# EAGLE board RCP2N64Adv2 (EAGLE 9.6.2)
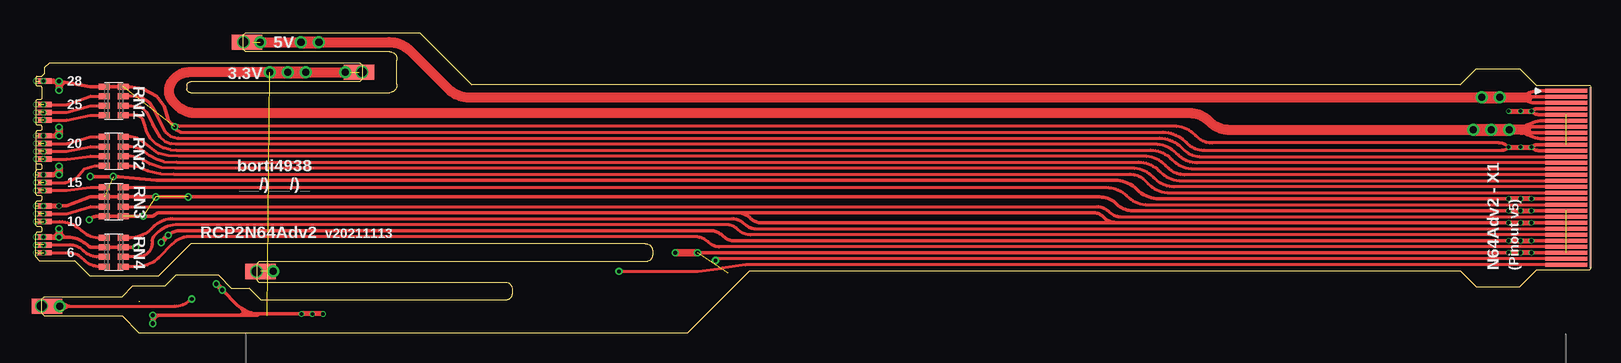
[diagram p0: board, top side]
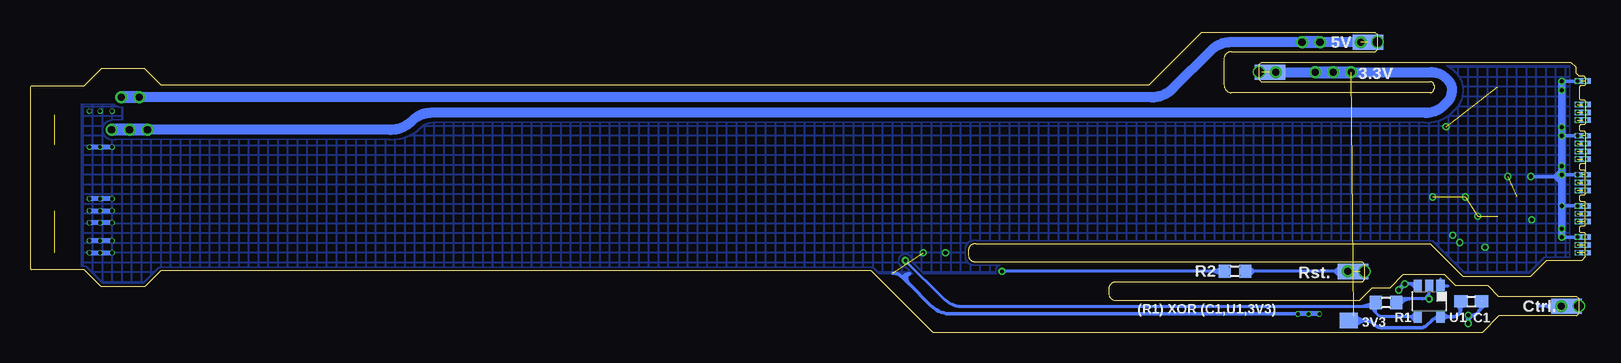
[diagram p1: board, bottom side, seen from below]

Size 129.6 x 25 mm. Coordinates in mm from the lower left corner, seen from the top.
Outline: 0,13.45 0.1,13.55 0.4,13.55 0.5,13.65 0.5,13.95 0.4,14.05 0.1,14.05 0,14.15 0,16.7 0.1,16.8 0.4,16.8 0.5,16.9 0.5,17.2 0.4,17.3 0.1,17.3 0,17.4 0,19.3 0.1,19.4 0.4,19.4 0.5,19.5 0.5,20.45 0.4,20.55 0.1,20.55 0,20.65 0,21.25 0.1,21.35 0.5,21.35 0.75,21.6 0.75,22.1 1.15,22.5 27,22.5 27.2,22.3 27.2,21.1 27,20.9 12.9,20.9 arc90 12.6,20.6 12.6,20.3 arc90 12.9,20 29.5,20 arc90 30.1,20.7 30.1,22.7 arc99 29.5,23.4 17.5,23.4 17.3,23.6 17.3,24.8 17.5,25 32,25 36.35,20.65 118.7,20.65 120.05,22 123.65,22 125.1,20.55 129.55,20.55 129.6,20.5 129.6,5.35 129.5,5.25 125.1,5.25 123.65,3.8 120.05,3.8 118.7,5.15 59.5,5.15 54.35,0 8.6,0 7.2,1.4 0.7,1.4 0.5,1.6 0.5,2.8 0.7,3 7.2,3 8.1,3.9 10.8,3.9 11.7,4.8 15.2,4.8 16.3,3.7 17.8,3.7 18.8,2.7 39.1,2.7 arc99 39.7,3.3 39.7,3.6 arc99 39.1,4.2 18.6,4.2 18.4,4.4 18.4,5.7 18.6,5.9 50.8,5.9 arc99 51.4,6.5 51.4,6.8 arc99 50.8,7.4 12.9,7.4 10.2,4.7 4.55,4.7 3.25,6 0.3,6 0,6.3 0,8.25 0.1,8.35 0.4,8.35 0.5,8.45 0.5,8.75 0.4,8.85 0.1,8.85 0,8.95 0,10.85 0.1,10.95 0.4,10.95 0.5,11.05 0.5,11.35 0.4,11.45 0.1,11.45 0,11.55 0,13.45
Outline: 0,14.1 0,13.45
Copper layers (1*16): Top 0.018mm / dielectric 1.55mm / Bottom 0.018mm
Design rules "Multi-CB_2L_100um-Tracks_OL35um *": minimum track width 0.1mm, minimum drill 0.3mm, track to track 6mil, track to pad 6mil, pad to pad 6mil, via to via 6mil, smd to smd 0mil, copper to edge 0.2mm, drill to drill 0.2mm, minimum pad ring 0.125mm, minimum via ring 0.02mm, stop-mask expansion 2mil, vias tented up to drill 0.45mm, thermal gap 0.2mm
bRestrict: area -0.4,5.9 to 1.2,22.5; area 125.4,5.2 to 129.6,20.7; area -0.6,0.3 to 60.2,4.8; area 119.3,17.6 to 121.8,19; area 117.5,19.1 to 125.5,22.7; 14 lines

## Footprints (pad centres in the part's own frame; a part is rotated, then mirrored left to right if it is on the bottom)
SMD1,27-2,54 = smd 1.27 x 2.54: 1 0,0
C0603 = smd 1.1 x 1: 1 -0.85,0; 2 0.85,0
CTS742C083 = smd 0.5 x 0.9: 1 -1.2,-0.8; 2 -0.4,-0.8; 3 0.4,-0.8; 4 1.2,-0.8; 5 1.2,0.8; 6 0.4,0.8; 7 -0.4,0.8; 8 -1.2,0.8
EDGE-FH12-30S-0.5SH = smd 0.3 x 3.5: 1 -7.25,3.25; 2 -6.75,3.25; 3 -6.25,3.25; 4 -5.75,3.25; 5 -5.25,3.25; 6 -4.75,3.25; 7 -4.25,3.25; 8 -3.75,3.25; 9 -3.25,3.25; 10 -2.75,3.25; 11 -2.25,3.25; 12 -1.75,3.25; 13 -1.25,3.25; 14 -0.75,3.25; 15 -0.25,3.25; 16 0.25,3.25; 17 0.75,3.25; 18 1.25,3.25; 19 1.75,3.25; 20 2.25,3.25; 21 2.75,3.25; 22 3.25,3.25; 23 3.75,3.25; 24 4.25,3.25; 25 4.75,3.25; 26 5.25,3.25; 27 5.75,3.25; 28 6.25,3.25; 29 6.75,3.25; 30 7.25,3.25
SMD0,45-1,35 = smd 1.35 x 0.45: P$1 0,0
SMD0.8SQ = smd 1.27 x 1.524: P$1 0,0
R0603 = smd 1 x 1.1: 1 -0.85,0; 2 0.85,0
DBV_R-PDSO-G5 = smd 0.69 x 0.99: 1 -0.95,-1.29; 2 0,-1.29; 3 0.95,-1.29; 4 0.95,1.3; 5 -0.95,1.3

## Placement (x,y rotation side)
+3.3V  [SMD1,27-2,54]  26.95,21.7 90 top
+3.3V1  [SMD1,27-2,54]  26.25,21.7 90 bottom
+5V  [SMD1,27-2,54]  17.6,24.2 90 top
+5V1  [SMD1,27-2,54]  18.1,24.2 90 bottom
C1  [C0603]  9.5,2.6 0 bottom
E$1  [CTS742C083]  6.5,6.7 90 top
E$2  [SMD1,27-2,54]  19.35,5.1 90 bottom
E$3  [CTS742C083]  6.5,19.3 270 top
E$4  [CTS742C083]  6.5,15.1 270 top
E$5  [CTS742C083]  6.5,10.9 270 top
E$6  [SMD1,27-2,54]  1.55,2.2 90 bottom
E$7  [EDGE-FH12-30S-0.5SH]  124.3,12.9 270 top
E$8  [SMD0,45-1,35]  0.65,9.9 0 top
E$9  [SMD0,45-1,35]  0.65,10.55 0 top
E$10  [SMD0,45-1,35]  0.65,11.85 0 top
E$11  [SMD0,45-1,35]  0.65,12.5 0 top
E$12  [SMD0,45-1,35]  0.65,13.15 0 top
E$13  [SMD0,45-1,35]  0.65,14.45 0 top
E$14  [SMD0,45-1,35]  0.65,15.1 0 top
E$15  [SMD0,45-1,35]  0.65,15.75 0 top
E$16  [SMD0,45-1,35]  0.65,16.4 0 top
E$17  [SMD0,45-1,35]  0.65,17.7 0 top
E$18  [SMD0,45-1,35]  0.65,18.35 0 top
E$19  [SMD0,45-1,35]  0.65,19 0 top
E$20  [SMD0.8SQ]  19.7,1 270 bottom
E$22  [SMD0,45-1,35]  0.2,19 0 bottom
E$23  [SMD0,45-1,35]  0.2,18.35 0 bottom
E$24  [SMD0,45-1,35]  0.2,17.7 0 bottom
E$25  [SMD0,45-1,35]  0.2,16.4 0 bottom
E$26  [SMD0,45-1,35]  0.2,15.75 0 bottom
E$27  [SMD0,45-1,35]  0.2,15.1 0 bottom
E$28  [SMD0,45-1,35]  0.2,14.45 0 bottom
E$29  [SMD0,45-1,35]  0.2,13.15 0 bottom
E$30  [SMD0,45-1,35]  0.2,12.5 0 bottom
E$31  [SMD0,45-1,35]  0.2,11.85 0 bottom
E$32  [SMD0,45-1,35]  0.2,10.55 0 bottom
E$33  [SMD0,45-1,35]  0.2,9.9 0 bottom
E$34  [SMD1,27-2,54]  18.75,5.1 90 top
E$35  [SMD1,27-2,54]  0.95,2.2 90 top
E$38  [SMD0,45-1,35]  0.65,9.25 0 top
E$40  [SMD0,45-1,35]  0.65,7.3 0 top
E$41  [SMD0,45-1,35]  0.65,6.65 0 top
E$42  [SMD0,45-1,35]  0.2,9.25 0 bottom
E$43  [SMD0,45-1,35]  0.2,7.95 0 bottom
E$44  [SMD0,45-1,35]  0.2,7.3 0 bottom
E$45  [SMD0,45-1,35]  0.2,6.65 0 bottom
E$46  [SMD0,45-1,35]  0.65,20.95 0 top
E$47  [SMD0,45-1,35]  0.2,20.95 0 bottom
GND  [SMD0,45-1,35]  0.65,7.95 0 top
R1  [R0603]  16.6,2.5 180 bottom
R2  [R0603]  29.2,5.1 180 bottom
U1  [DBV_R-PDSO-G5]  13,2.6 180 bottom

## Library data of the parts
+3.3V +3.3V1 +5V +5V1 E$2 E$6 E$8-E$20 E$22-E$35 E$38 E$40-E$47 GND = wirepad
C1 R1 R2 = rcl
E$1 E$3-E$5 = resistor-net
E$7 = con-hirose
U1 = 74xx-little-de

## Nets
3V3: +3.3V1.1 +3.3V.1 C1.1 E$7.6 E$7.7 E$7.8 E$7.9 E$20.P$1 U1.5
#DSYNC: E$5.1 E$10.P$1 E$31.P$1
#DSYNC.1: E$5.8 E$7.20
+5V: +5V1.1 +5V.1 E$7.1 E$7.2 E$7.3
CTRL: E$6.1 E$35.1 R1.1 U1.2
CTRL.1: E$7.29 R1.2 U1.4
D0: E$3.2 E$19.P$1 E$22.P$1
D0.1: E$3.7 E$7.12
D1: E$3.3 E$18.P$1 E$23.P$1
D1.1: E$3.6 E$7.13
D2: E$3.4 E$17.P$1 E$24.P$1
D2.1: E$3.5 E$7.14
D3: E$4.1 E$15.P$1 E$26.P$1
D3.1: E$4.8 E$7.15
D4: E$4.2 E$14.P$1 E$27.P$1
D4.1: E$4.7 E$7.16
D5: E$4.3 E$13.P$1 E$28.P$1
D5.1: E$4.6 E$7.17
D6: E$4.4 E$11.P$1 E$30.P$1
D6.1: E$4.5 E$7.18
GND: C1.2 E$1.3 E$1.6 E$3.1 E$3.8 E$5.2 E$5.4 E$5.5 E$5.7 E$7.4 E$7.5 E$7.10 E$7.11 E$7.19 E$7.21 E$7.23 E$7.26 E$7.28 E$9.P$1 E$12.P$1 E$16.P$1 E$25.P$1 E$29.P$1 E$32.P$1 E$46.P$1 U1.3
LRCLK: E$1.5 E$38.P$1
LRCLK.1: E$1.4 E$7.24
RST: E$2.1 E$34.1 R2.1
RST.1: E$7.30 R2.2
SCLK: E$1.8 E$41.P$1
SCLK.1: E$1.1 E$7.27
SDATA: E$1.7 E$40.P$1
SDATA.1: E$1.2 E$7.25
VCLK: E$5.3 E$8.P$1 E$33.P$1
VCLK.1: E$5.6 E$7.22

## Tracks (layer width: path | path; a pad name or v marks a point on that pad's centre or on a via)
3V3  (via drill 0.6 pad 1)  (2 unrouted)
  Top 0.254: E$7.6 126,17.65 | 124.21,16.91 124.2,16.9 | 123.81,16.89 123.8,16.9 123.81,16.91
  Top 0.305: E$7.7 124.8,17.15 arc45 124.21,16.91 | E$7.8 124.8,16.65 arc-45 124.2,16.9 | E$7.9 125.6,16.15 arc-45 123.81,16.89 | E$7.6 125.6,17.65 arc45 123.81,16.91
  Top 0.813: v22.5,21.7 v25.8,21.7 | 124.2,16.9 123.8,16.9 v122.8,16.9 | v19.5,21.7 12.81,21.7 arc45 11.6,21.2 11.52,21.12 arc45 11.1,20.1 arc45 11.45,19.25 11.7,19 arc45 13.39,18.3 96.11,18.3 arc-45 97.8,17.6 arc45 99.49,16.9 v119.8,16.9
  Top 1.016: v119.8,16.9 v121.3,16.9 v122.8,16.9 | v19.5,21.7 v21,21.7 v22.5,21.7
  Bottom 0.305: 12,1.3 U1.5 12.08,1.3 arc-45 12.8,1 13.19,0.61 arc45 13.7,0.4 16.88,0.4 arc45 17.6,0.7 arc-45 18.32,1 18.5,1 | 12,1.3 11.5,1.3 | 11.5,1.3 11.08,1.3 arc-45 10.6,1.5 arc-45 10.35,2.1 10.35,2.45 | 10.35,2.45 C1.1 | 12,1.6 11.5,1.3 | 11.5,1.3 12,1 | 10.35,2.45 10.7,2.45 10.4,1.95 10,2.45 | 12,1.3 12.2,1.5 12.5,1.2 12.2,1 | 18.5,1 E$20.P$1 | 19.3,1.4 18.5,1 | 18.5,1 19.2,0.6
  Bottom 0.813: +3.3V1.1 v22.5,21.7 | v19.5,21.7 12.81,21.7 arc45 11.6,21.2 11.45,21.05 arc45 11.1,20.2 arc45 11.52,19.18 11.73,18.97 arc45 13.35,18.3 96.25,18.3 arc-45 97.7,17.7 97.76,17.64 arc45 99.55,16.9 v119.8,16.9
  Bottom 1.016: v119.8,16.9 v121.3,16.9 v122.8,16.9 | v22.5,21.7 v21,21.7 v19.5,21.7
#DSYNC  (via drill 0.3 pad 0.45)  (1 unrouted)
  Top 0.254: E$10.P$1 2.6,11.85 4.55,12.1 E$5.1
  other vias: 0.65,11.85
#DSYNC1  (via drill 0.3 pad 0.45)
  other vias: 0,11.85
#DSYNC.1
  Top 0.254: E$5.8 89.21,12.1 arc-45 90.9,11.4 90.91,11.39 arc45 92.7,10.65 E$7.20
+5V  (via drill 0.6 pad 1)  (1 unrouted)
  Top 0.254: 124.42,19.65 arc45 124.3,19.6
  Top 0.305: E$7.2 124.42,19.65 | E$7.1 125.23,20.15 arc45 123.9,19.6 arc45 124.99,19.15 E$7.3
  Top 0.813: +5V.1 v22.1,24.2 | v122,19.6 123.9,19.6 124.3,19.6 | v23.6,24.2 29.45,24.2 arc-45 31.24,23.46 34.36,20.34 arc45 36.15,19.6 v120.5,19.6
  Top 1.016: v120.5,19.6 v122,19.6 | v22.1,24.2 v23.6,24.2
  Bottom 0.813: +5V1.1 v22.1,24.2 | v23.6,24.2 29.51,24.2 arc-45 31.2,23.5 34.36,20.34 arc45 36.15,19.6 v120.5,19.6
  Bottom 1.016: v120.5,19.6 v122,19.6 | v22.1,24.2 v23.6,24.2
  other vias: 18.7,24.2
A_LRCLK  (via drill 0.3 pad 0.45)  (1 unrouted)
  other vias: 0.65,9.25 0,9.25
A_SCLK  (via drill 0.3 pad 0.45)  (1 unrouted)
  other vias: 0.65,6.65 0,6.65
A_SDATA  (via drill 0.3 pad 0.45)  (1 unrouted)
  other vias: 0,7.3 0.65,7.3
CTRL  (via drill 0.3 pad 0.6, 0.6 pad 1)  (1 unrouted)
  Top 0.254: E$35.1 v2,2.2 2.8,2.2 | 2,2.6 2.8,2.2 | 2.8,2.2 2,1.8 | v13,2.8 arc-45 11.55,2.2 2.8,2.2
  Bottom 0.254: 13,3.3 v13,2.8 13.6,2.8 | 13,3.3 U1.2 | 13.6,2.8 14.6,2.8 | 14.6,2.8 14.9,2.8 | 14.9,2.8 15.1,2.8 | 15.1,2.8 15.45,2.8 R1.1 | 15.1,2.8 15.6,2.3 | 15.6,2.3 15.7,2.3 | 15.6,2.3 15.4,2.3 14.9,2.8 | 3.2,2.2 E$6.1 1.3,2.2 | 3.2,2.2 3.9,2.2 | 2.4,2.5 3.2,2.2 | 3.2,2.2 2.3,1.9 | 13.6,2.8 13.3,2.9 13,3.3 | 14.6,2.8 15.2,2.6
CTRL.1  (via drill 0.3 pad 0.6)
  Top 0.254: E$7.29 56.8,6.15 arc-45 v56.65,6
  Bottom 0.254: R1.2 17.77,2.18 | 17.77,2.18 17.85,2.1 17.85,2.05 17.45,1.65 | U1.4 14.5,1.3 | 14.5,1.3 16.9,1.3 17.3,1.5 17.45,1.65 | 17.45,1.65 R1.2 | 14,1.6 14.2,1.6 14.5,1.3 | 14.5,1.3 14.2,1 14.1,1 | v56.65,6 53.53,2.88 arc-45 51.82,2.18 18.5,2.18 | 18.5,2.18 17.77,2.18 | 18.2,2.2 17.6,2.6 R1.2 | R1.2 18.5,2.18
D0  (via drill 0.3 pad 0.45)  (1 unrouted)
  Top 0.254: E$19.P$1 2.6,19 4.55,19.7 E$3.2
  other vias: 0.65,19
D0.1
  Top 0.254: E$3.7 7.95,19.7 8.85,19.55 9.5,19.15 10,18.35 10.8,16.75 11.25,16.35 11.85,16.2 93.65,16.2 arc-45 95.44,15.46 95.6,15.3 arc45 97.17,14.65 E$7.12
D1  (via drill 0.3 pad 0.45)  (1 unrouted)
  Top 0.254: E$18.P$1 2.6,18.35 4.55,18.9 E$3.3
  other vias: 0.65,18.35
D1.1
  Top 0.254: E$3.6 8,18.9 8.75,18.8 9.2,18.4 9.6,17.7 9.75,17.3 10.35,16.3 10.75,15.95 11.3,15.75 11.65,15.7 93.25,15.7 arc-45 95.04,14.96 95.2,14.8 arc45 96.77,14.15 E$7.13
D2  (via drill 0.3 pad 0.45)  (1 unrouted)
  Top 0.254: E$17.P$1 2.6,17.7 4.55,18.1 E$3.4
  other vias: 0.65,17.7
D2.1
  Top 0.254: E$3.5 8.45,18.1 8.7,18 8.9,17.8 9.1,17.3 9.25,16.75 9.6,16.15 10.05,15.7 10.6,15.4 11.2,15.25 11.7,15.2 92.91,15.2 arc-45 94.6,14.5 94.71,14.39 arc45 96.5,13.65 E$7.14
D3  (via drill 0.3 pad 0.45)  (1 unrouted)
  Top 0.254: E$15.P$1 2.6,15.75 4.55,16.3 E$4.1
  other vias: 0.65,15.75
D3.1
  Top 0.254: E$4.8 7.95,16.3 8.5,16.2 8.98,15.88 10.21,14.94 11.04,14.74 12,14.7 | 12,14.7 11.9,14.7 | E$7.15 95.73,13.15 arc-45 94.4,13.7 94.14,13.96 arc45 92.35,14.7 12,14.7
D4  (via drill 0.3 pad 0.45)  (1 unrouted)
  Top 0.254: E$14.P$1 2.6,15.1 4.55,15.5 E$4.2
  other vias: 0.65,15.1
D4.1
  Top 0.254: E$4.7 7.95,15.5 8.7,15.3 9.1,15.05 9.5,14.75 10.05,14.45 10.65,14.25 11.75,14.2 91.91,14.2 arc-45 93.6,13.5 93.71,13.39 arc45 95.5,12.65 E$7.16
D5  (via drill 0.3 pad 0.45)  (1 unrouted)
  Top 0.254: E$13.P$1 2.6,14.45 4.55,14.7 E$4.3
  other vias: 0.65,14.45
D5.1
  Top 0.254: E$4.6 7.95,14.7 8.6,14.55 8.95,14.35 9.5,14.05 10.45,13.75 11.6,13.7 91.35,13.7 arc-45 93.14,12.96 93.3,12.8 arc45 94.87,12.15 E$7.17
D6  (via drill 0.3 pad 0.45)  (1 unrouted)
  Top 0.254: E$11.P$1 2.45,12.5 3.4,12.9 4.05,13.65 4.9,13.9 E$4.4
  other vias: 0.65,12.5
D6.1
  Top 0.254: E$4.5 7.95,13.9 8.6,13.8 9.35,13.5 10.4,13.25 11.5,13.2 91.19,13.2 arc-45 92.4,12.7 92.71,12.39 arc45 94.5,11.65 E$7.18
D7  (via drill 0.3 pad 0.45)
  other vias: 0,12.5
D8  (via drill 0.3 pad 0.45)
  other vias: 0,14.45
D9  (via drill 0.3 pad 0.45)
  other vias: 0,15.1
D10  (via drill 0.3 pad 0.45)
  other vias: 0,15.75
D11  (via drill 0.3 pad 0.45)
  other vias: 0,18.35
D12  (via drill 0.3 pad 0.45)
  other vias: 0,17.7
D13  (via drill 0.3 pad 0.45)
  other vias: 0,19
GND  (via drill 0.3 pad 0.43, 0.3 pad 0.45, 0.35, 0.35 pad 0.6)  (15 unrouted)
  Top 0.254: v0.65,7.95 v0,7.95 | 0.33,10.55 E$9.P$1 | E$46.P$1 0.33,20.95 | 11.6,17 12.1,16.7 93.95,16.7 arc-45 95.74,15.96 95.9,15.8 arc45 97.35,15.2 122.15,15.2 arc45 v122.75,15.45 arc45 121.91,15.8 98.01,15.8 arc-45 96.8,16.3 96.64,16.46 arc45 94.85,17.2 12.8,17.2 12,17.19 | 12,17.19 11.47,17.18 | 12,17.19 11.31,17.39
  Top 0.305: v1.95,10.55 2.6,10.55 4.55,11.3 E$5.2 E$5.7 88.65,11.3 arc-45 90.1,10.7 arc45 91.43,10.15 v122.75,10.15 | v1.95,20.95 2.4,20.87 | 2.4,20.87 4.55,20.5 E$3.1 E$3.8 7.8,20.5 8.9,20.3 10.1,19.7 10.7,18.85 11.05,17.75 11.31,17.39 11.47,17.18 11.6,17 | v4.55,13 6.92,13 8.65,12.8 10.05,12.7 89.95,12.7 arc-45 91.74,11.96 91.81,11.89 arc45 93.6,11.15 v122.75,11.15 | v1.95,7.95 2.4,7.95 | 2.4,20.87 1.95,20.42 v1.95,20.2 1.95,20.5 1.5,20.95 | 1.5,16.4 1.95,16.85 v1.95,17.1 | v1.95,13.85 1.95,13.65 1.45,13.15 | 1.45,7.95 1.95,8.45 v1.95,8.65 1.95,8.4 2.4,7.95 | 2.4,7.95 2.71,7.95 arc-45 4.28,7.3 arc45 4.76,7.1 E$1.6 E$1.3 v8.35,7.1 | v4.45,9.4 arc-45 5.17,9.7 E$5.4 E$5.5 9.66,9.7 arc45 9.9,9.8 arc-45 10.38,10 58.39,10 | E$7.28 v124.65,6.65 | E$7.10 125.13,15.65 arc45 v124.65,15.45 arc45 125.37,15.15 E$7.11 | E$7.4 125.13,18.65 arc45 v124.65,18.45 arc45 125.37,18.15 E$7.5 | E$7.19 v124.65,11.15 | E$7.21 v124.65,10.15 | E$7.23 v124.65,9.15 | E$7.26 v124.65,7.65 | v22.15,1.55 18.6,1.55 | 18.6,1.55 arc-45 16.81,2.29 v15.55,3.55 | v9.75,1.45 10.2,1.45 | 10.2,1.45 17,1.45 | 17,1.45 18.36,1.45 arc45 18.6,1.55 | 17.6,1.75 17.3,1.6 | 17,1.45 17.3,1.6 | 17.3,1.6 17.25,1.9 | v9.75,0.75 arc-45 9.93,1.18 10.2,1.45 | v122.75,9.15 90.16,9.15 | 90.16,9.15 60.45,9.15 arc-45 59.6,9.5 arc45 58.39,10 | v122.75,7.65 58.29,7.65 arc-45 57.2,8.1 arc45 56.23,8.5 12.02,8.5 arc45 v11.05,8.1 | v122.75,6.65 v55.15,6.65 | 90.16,9.15 arc-45 88.95,9.65 arc45 88.11,10 58.39,10
  Top 0.406: E$16.P$1 1.5,16.4 v1.95,16.4 | v0.65,7.95 1.45,7.95 v1.95,7.95 | v1.95,13.15 1.45,13.15 E$12.P$1 | E$46.P$1 1.5,20.95 v1.95,20.95 | E$9.P$1 v1.95,10.55 | v124.65,6.65 v123.75,6.65 v122.75,6.65 | v122.75,7.65 v123.75,7.65 v124.65,7.65 | v122.75,9.15 v123.75,9.15 v124.65,9.15 | v122.75,10.15 v123.75,10.15 v124.65,10.15 | v124.65,11.15 v123.75,11.15 v122.75,11.15 | v122.75,15.45 v123.75,15.45 v124.65,15.45 | v122.75,18.45 v123.75,18.45 v124.65,18.45 | v15.55,3.55 v15.05,4.05 | v23.95,1.55 v23.05,1.55 v22.15,1.55 | v9.75,1.45 v9.75,0.75 | v10.45,7.5 v11.05,8.1
  Top 0.61: v1.95,8.65 v1.95,7.95 | v1.95,13.85 v1.95,13.15 | v1.95,17.1 v1.95,16.4 | v1.95,20.95 v1.95,20.2 | v55.15,6.65 v53.3,6.65
  Bottom 0.305: v4.55,13 2.6,13 | 2.6,13 1.95,13 v1.95,13.15 E$29.P$1 | 2.6,13 1.95,13.65 | 2.6,13 1.95,12.35 | v15.05,4.05 14.5,4.05 | 14.5,4.05 14.11,4.05 U1.3 | 14.5,4.05 14.1,3.65 14,3.65 | v0.65,7.95 v1.95,7.95 | E$32.P$1 v1.95,10.55 1.95,10.5 | E$25.P$1 v1.95,16.4 | E$46.P$1 v1.95,20.95 | C1.2 8.65,2.45 arc45 9,1.6 arc45 9.36,1.45 | 9.36,1.45 v9.75,1.45 | v9.75,0.75 arc45 9.53,1.28 9.36,1.45 | 8.6,2.6 8.4,2.6 8.4,2.25 8.8,1.85 | v23.95,1.55 52.8,1.55 arc45 54.59,2.29 56.35,4.05 | 57.7,4.95 arc45 56.93,4.63 56.9,4.6 | 56.35,4.05 56.7,4.4 | 56.7,4.4 56.9,4.6 | 56.7,4.4 arc45 56.63,4.57 56.52,4.68 | 56.52,4.68 56.3,4.9 arc-45 56.81,4.69 56.9,4.6 | 56.35,4.05 arc45 56.52,4.47 56.52,4.68
  Bottom 0.406: v15.05,4.05 v15.55,3.55 | v22.15,1.55 v23.05,1.55 v23.95,1.55 | v9.75,0.75 v9.75,1.45 | v122.75,15.45 v123.75,15.45 v124.65,15.45 | v122.75,11.15 v123.75,11.15 v124.65,11.15 | v124.65,10.15 v123.75,10.15 v122.75,10.15 | v122.75,9.15 v123.75,9.15 v124.65,9.15 | v122.75,7.65 v123.75,7.65 v124.65,7.65 | v124.65,6.65 v123.75,6.65 v122.75,6.65
  Bottom 0.61: v1.95,7.95 1.95,10.5 1.95,12.35 1.95,13 1.95,13.65 v1.95,16.4 v1.95,20.95
  other vias: 0.65,16.4 0.65,13.15 0.65,10.55 0,20.95 0.65,20.95 0,16.4 0,13.15 0,10.55 10,11.3 12.7,11.3 11.6,17.15 6.45,13 8.95,9.7
  pour Bottom (hatched): 0.7,-0.2 0.7,25.6 129.5,25.6 129.5,0.3 129.5,-0.2
LRCLK
  Top 0.254: E$38.P$1 2,9.25 arc-45 3.79,8.51 3.71,8.59 arc45 5.37,7.9 E$1.5
LRCLK.1
  Top 0.254: 128.25,8.65 E$7.24 60.09,8.65 arc-45 59,9.1 arc45 58.03,9.5 11.41,9.5 arc45 9.86,8.86 9.64,8.64 arc-45 7.85,7.9 E$1.4
RST  (via drill 0.6 pad 1)  (1 unrouted)
  Bottom 0.254: E$2.1 v19.8,5.1 20.8,5.1 | 20.8,5.1 20.9,5.1 | 20.9,5.1 27.6,5.1 | 27.6,5.1 R2.1 | 20.8,5.1 20.5,5.4 20.3,5.4 | 20.9,5.1 20.5,4.7 20.4,4.7 | 20.9,5.1 20.5,5.5 20.4,5.5 | 27.6,5.1 28,5.5 | 27.6,5.1 28,4.7
RST.1  (via drill 0.3 pad 0.6)
  Top 0.254: v48.6,5.1 55.2,5.1 57.15,5.35 59.15,5.65 E$7.30
  Bottom 0.254: R2.2 30.9,5.1 | 30.9,5.1 v48.6,5.1 | 30.2,5.4 30.9,5.1 | 30.9,5.1 30.2,4.8
S$3  (via drill 0.8 pad 1)
  other vias: 27.2,21.7
S$7  (via drill 0.8 pad 1)
  other vias: 17.3,24.2
S$8  (via drill 0.8 pad 1)
  other vias: 18.4,5.1
S$9  (via drill 0.8 pad 1)
  other vias: 0.5,2.2
S$10
  Bottom 0.254: 12.05,4.45 12.05,3.9 | 12.05,3.9 12.05,3.1 | 12.05,3.9 11.45,3.9
SCLK
  Top 0.254: E$41.P$1 2.64,6.65 | 2.64,6.65 2.65,6.65 | E$1.8 5.31,5.5 arc-45 4.1,6 4.02,6.08 arc45 2.64,6.65
SCLK.1
  Top 0.254: 128.25,7.15 E$7.27 56.95,7.15 arc-45 56.1,7.5 arc45 54.89,8 12.91,8 arc45 11.36,7.36 10.24,6.24 arc-45 8.45,5.5 E$1.1
SDATA
  Top 0.254: E$40.P$1 2.83,7.3 arc-45 3.97,6.83 3.98,6.82 arc45 5.24,6.3 E$1.7
SDATA.1
  Top 0.254: 128.25,8.15 E$7.25 59.59,8.15 arc-45 58.5,8.6 arc45 57.53,9 11.85,9 arc45 10.06,8.26 9.9,8.1 arc45 9.7,7.62 9.7,7.42 arc-45 9.4,6.7 9.35,6.65 arc-45 8.5,6.3 E$1.2
VCLK  (via drill 0.3 pad 0.45)  (1 unrouted)
  Top 0.254: E$8.P$1 2.6,9.9 4.55,10.5 E$5.3
  other vias: 0.65,9.9
VCLK1  (via drill 0.3 pad 0.45)
  other vias: 0,9.9
VCLK.1
  Top 0.254: 128.25,9.65 E$7.22 90.8,9.65 90.49,9.65 arc-45 89.4,10.1 arc45 88.43,10.5 E$5.6

## Text on the board
tPlace: 5V | 28 | RN1 | 3.3V | 25 | RN2 | 20 | borti4938 / __/)__/)_ | 15 | RN3 | 10 | RN4 | RCP2N64Adv2 | v20211113 | 6 | N64Adv2 - X1 | (Pinout v5)
bPlace: 5V | 3.3V | Rst. | Ctrl. | (R1) XOR (C1,U1,3V3) | 3V3